# EAGLE board ProximitySensor (EAGLE 5.12)
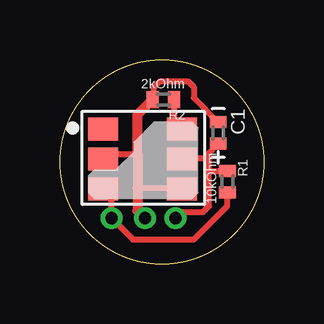
[diagram p0: board, top side]

Size 8.51 x 8.51 mm. Coordinates in mm from the lower left corner, seen from the top.
Outline: circle at 4.25,4.25 radius 4.25
Copper layers (1*16): Top 0.0178mm / dielectric 1.4986mm / Bottom 0.0178mm
Design rules "SSC-EAGLE-2Lyr_v1.0.0.3 *": minimum track width 6mil, minimum drill 14mil, track to track 10mil, track to pad 10mil, pad to pad 10mil, via to via 10mil, smd to smd 6mil, copper to edge 20mil, drill to drill 16mil, minimum pad ring 8mil, minimum via ring 8mil, stop-mask expansion 3mil, vias tented up to drill 0mil, thermal gap 10mil

## Footprints (pad centres in the part's own frame; a part is rotated, then mirrored left to right if it is on the bottom)
C0402 = smd 0.5 x 0.7: NEG -0.45,0; POS 0.45,0
R0402 = smd 0.5 x 0.7: 1 -0.45,0; 2 0.45,0
OSRAM-SFH7741-6SMD = smd 1.25 x 0.95: P$1 -1.625,1.25; P$2 -1.625,0; P$3 -1.625,-1.25; P$4 1.675,-1.25; P$5 1.675,0; P$6 1.675,1.25

## Placement (x,y rotation side)
C1  1.0uF  [C0402]  6.6,5.46 270 top
R1  10kOhm  [R0402]  6.99,3.43 90 top
R2  2kOhm  [R0402]  4.32,6.86 0 top
U$1  OSRAM-SFH7741  [OSRAM-SFH7741-6SMD]  3.43,4.37 0 top

## Library data of the parts
C1 = Passives; MANUFACTURER: Murata; MAN_PART_NO: GRM155R60J105ME19D; PRICE_1: 0.10000; PRICE_50: 0.02220; URL: http://www.digikey.com/product-detail/en/GRM155R60J105ME19D/490-1319-1-ND/587924; VENDOR: Digikey
R1 = Passives; MANUFACTURER: Rohm; MAN_PART_NO: MCR01MRTJ103; PRICE_1: 0.04; PRICE_50: 0.0138; URL: http://www.digikey.com/product-detail/en/MCR01MRTJ103/RHM10KCECT-ND/2796445; VENDOR: Digikey
R2 = Passives; MANUFACTURER: Stackpole; MAN_PART_NO: RMCF0402FT2K00; PRICE_1: 0.04; PRICE_50: 0.0138; URL: http://www.digikey.com/product-detail/en/RMCF0402FT2K00/RMCF0402FT2K00CT-ND/1942922; VENDOR: Digikey
U$1 = Sensors; MANUFACTURER: Osram; MAN_PART_NO: SFH 7741-Z; PRICE_1: 1.63; PRICE_50: 1.358; URL: http://www.digikey.com/scripts/DkSearch/dksus.dll?WT.z_header=search_go&lang=en&keywords=475-2663-1-nd&x=0&y=0&cur=USD; VENDOR: Digikey

## Nets
3V: C1.POS R1.2 U$1.P$5
GND: C1.NEG R2.1 U$1.P$2 U$1.P$4
N$2: R2.2 U$1.P$6
OUT: R1.1 U$1.P$3

## Tracks (layer width: path | path; a pad name or v marks a point on that pad's centre or on a via)
3V  (via drill 0.51)
  Top 0.254: U$1.P$5 5.29,4.39 6.17,4.39 6.22,4.45 | v4.83,1.91 5.08,2.16 5.97,2.16 6.22,2.41 6.22,3.94 | 6.22,3.94 6.22,4.45 | 6.22,4.45 6.22,4.63 C1.POS | R1.2 6.28,3.88 6.22,3.94
GND  (via drill 0.51)
  Top 0.254: U$1.P$2 1.78,4.57 3.23,4.57 | U$1.P$4 4.78,3.17 3.23,3.17 | C1.NEG 5.59,6.93 5.59,7.37 5.33,7.62 4.19,7.62 3.94,7.37 3.94,6.93 R2.1
  Top 0.406: v3.56,1.91 3.23,2.22 3.23,3.17 3.23,4.57 3.23,6.22 R2.1
N$2
  Top 0.254: U$1.P$6 4.77,5.85 R2.2
OUT  (via drill 0.51)
  Top 0.254: U$1.P$3 2.16,3.02 v2.16,1.91 3.05,1.02 5.59,1.02 6.99,2.41 R1.1

## Text on the board
bNames: VDD | OUT | GND